# Altium PCB robot.PCBDOC (part 1 of 2)
Units mm, origin at the board's own origin, x right, y up, seen from the top; angles counter-clockwise.
Board outline 152.4 x 101.6 mm, 2 copper layers (Top Layer, Bottom Layer); 107 components, 0 nets, 589 pads, 29 vias.
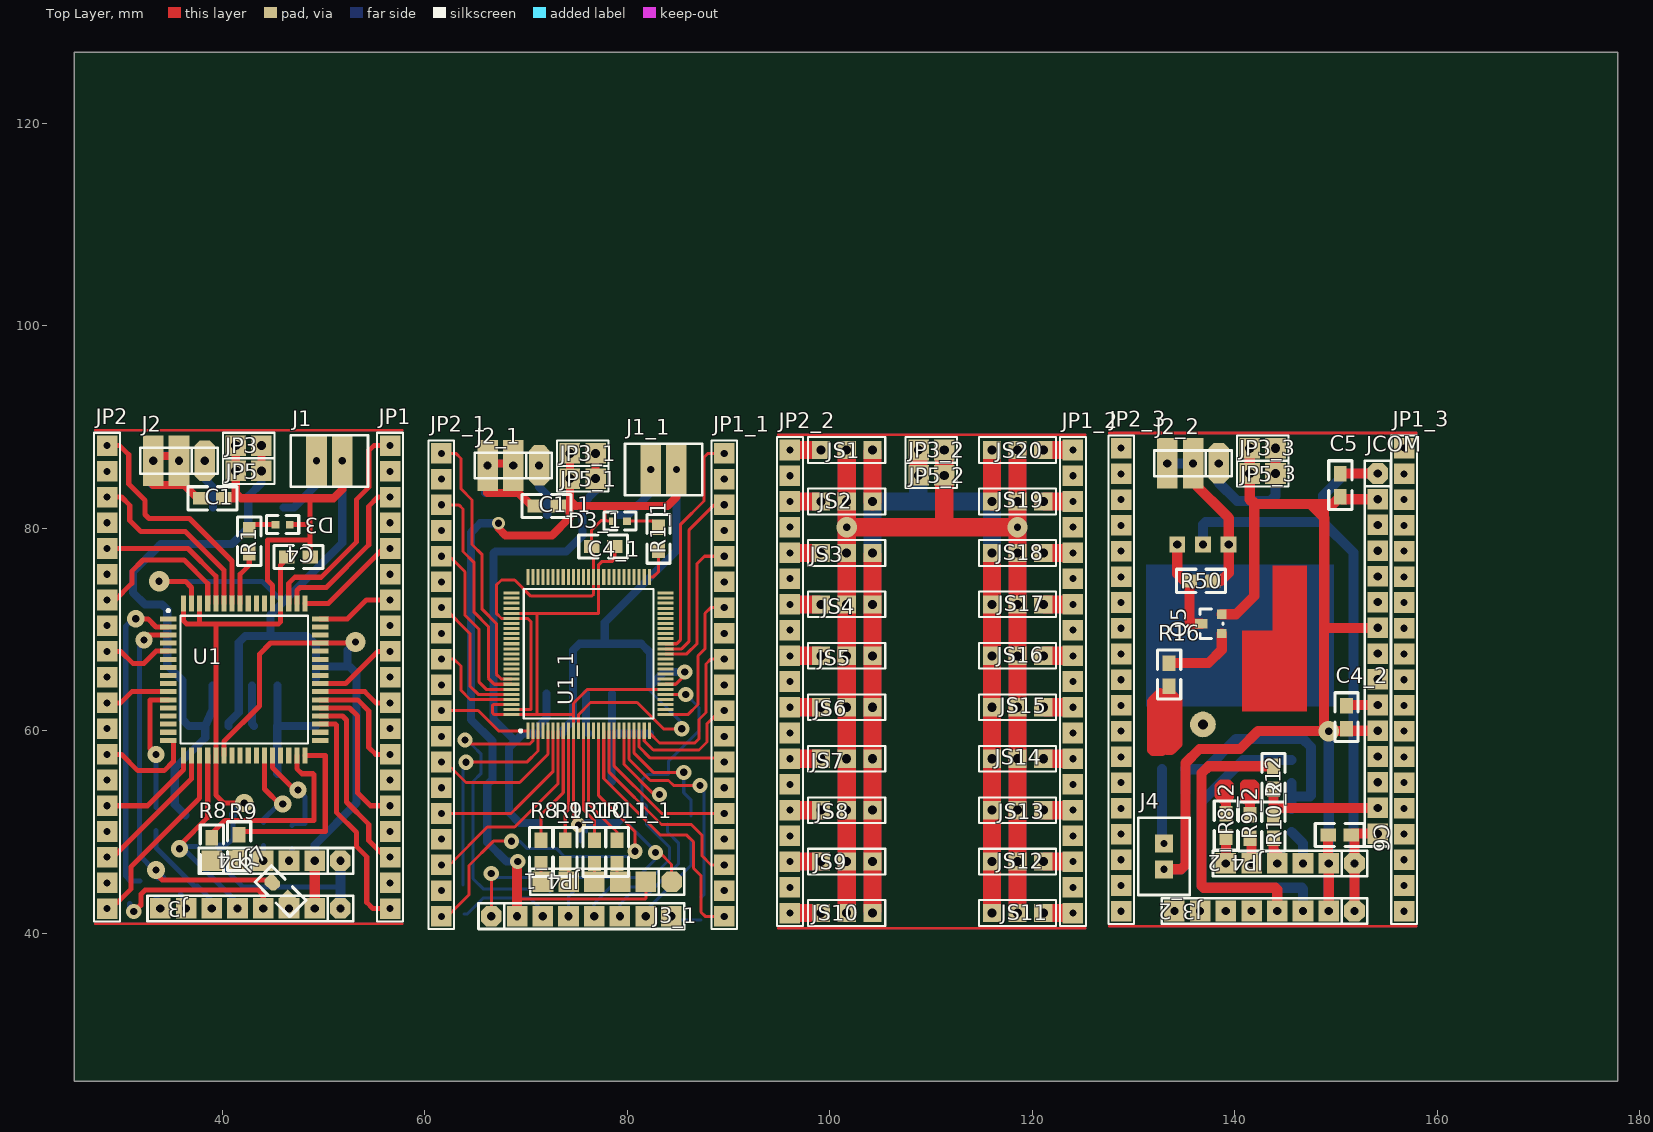
[diagram p0: Top Layer view]
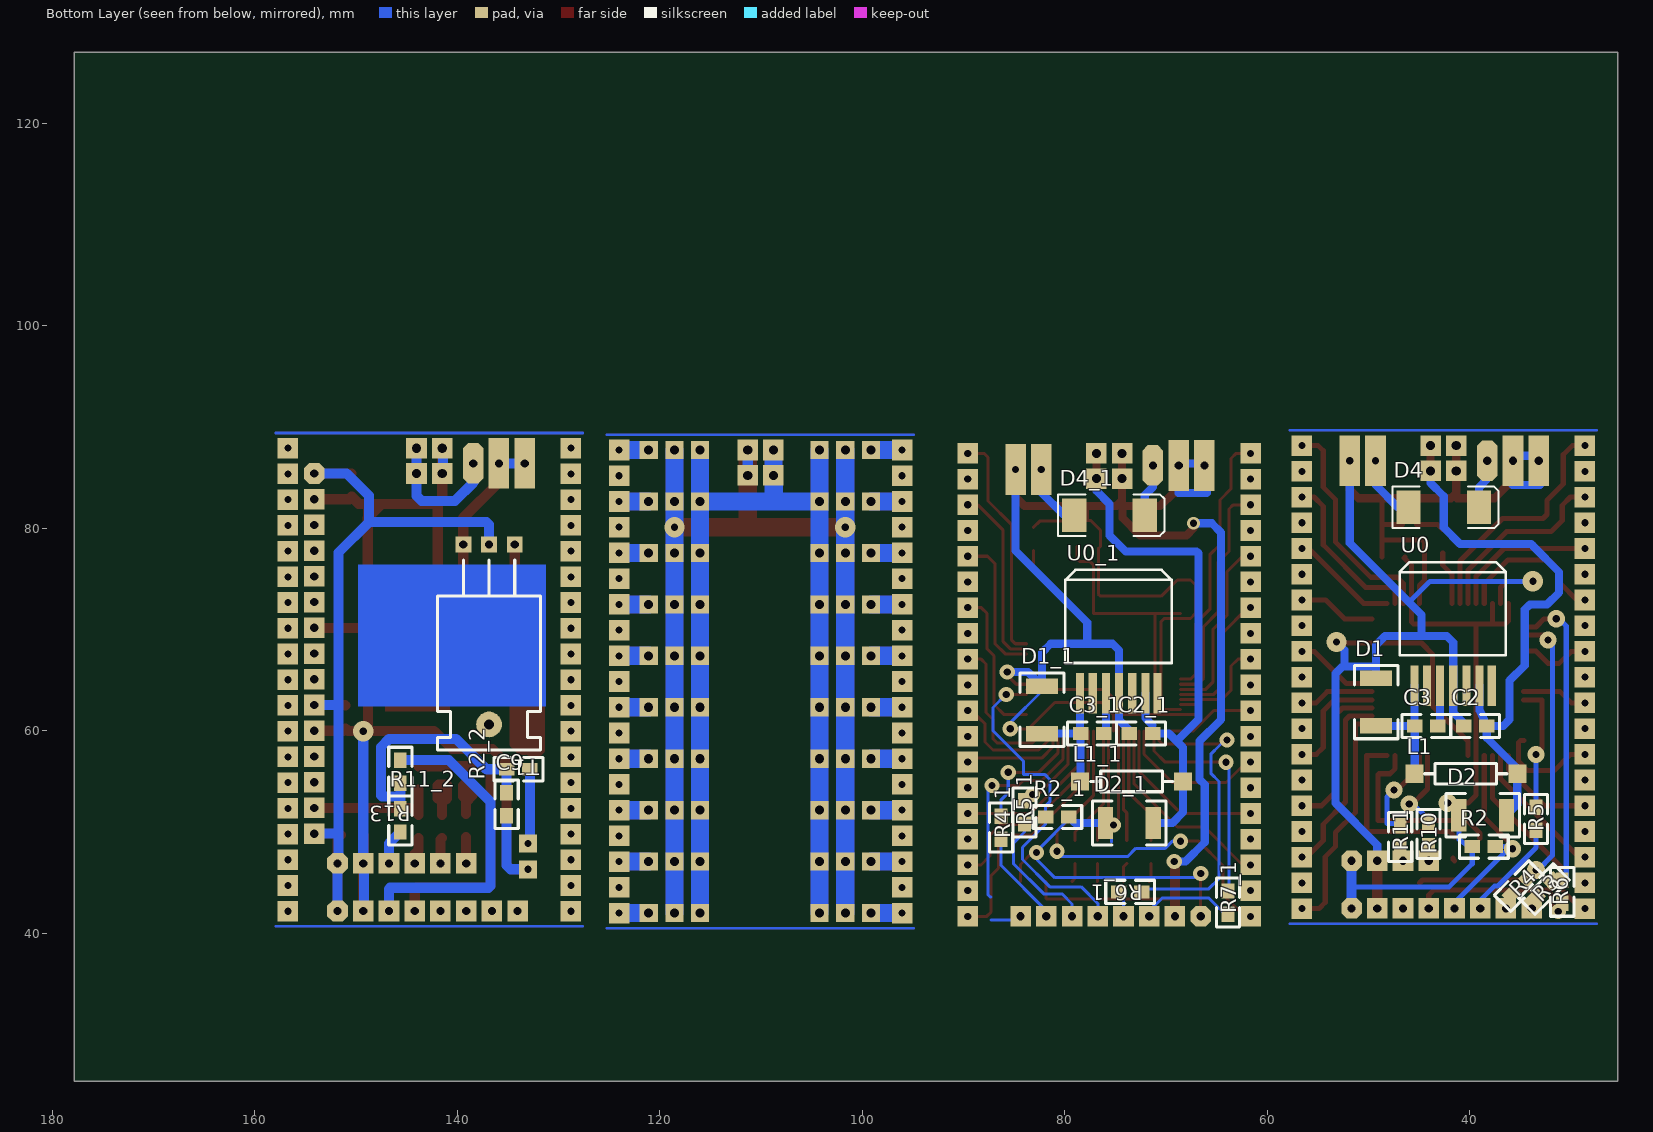
[diagram p1: Bottom Layer view, seen from below]

## Layer stack, top to bottom
Top Layer: signal copper 0.0356
Dielectric: dielectric 0.32, FR-4, Dk 4.8
Bottom Layer: signal copper 0.0356

## Board outline
25.4,25.4 177.8,25.4 177.8,127 25.4,127

## Design rules (kind name [scope] priority, off if disabled: settings)
Clearance [All] p1 off: gap=0.01
ComponentClearance [All] p1 off: gap=0.254 collisioncheckmode=0
PolygonConnect [All] p1: connectstyle=Relief reliefconductorwidth=0.254 reliefentries=4 polygonreliefangle="90 Angle"
RoutingLayers [All] p1: top layer=Horizontal bottom layer=Vertical
RoutingVias [All] p1: holewidth=0.711 width=1.27 viastyle="Through Hole" minholewidth=0.711 minwidth=1.27 maxholewidth=0.711 maxwidth=1.27
SolderMaskExpansion [All] p1: expansion=0.102
TestPointUsage [All] p1: valid=0 allowmultiple=FALSE
Testpoint [All] p1: side=15 testpointundercomponent=TRUE minsize=1.016 maxsize=2.54 preferedsize=1.524 minholesize=0 maxholesize=1.016 preferedholesize=0.813 testpointgrid=0.025 style=1023 order=1234567890
Width [All] p1 off: maxlimit=1 minlimit=0.254 preferedwidth=0.254 minimp=50.000000 maximp=50.000000 favimp=50.000000
16 further rules are at their usual default settings.

## Components (designator, comment, footprint, x,y, rotation, side; value= is the part's Value field where it differs from the comment)
C1 "100nF" 0805#1 40.178,82.962 r180 top
C1_1 "100nF" 0805#1 73.179,82.2 r180 top (schematic designator C1)
C2 "100nF" 0805#1 40.614,60.486 r180 bottom
C2_1 "100nF" 0805#1 73.615,59.724 r180 bottom (schematic designator C2)
C3 "10nF" 0805#1 43.154,60.486 r0 bottom
C3_1 "10nF" 0805#1 76.155,59.724 r0 bottom (schematic designator C3)
C4 "100nF" 0805#1 48.678,77.162 r180 top
C4_1 "100nF" 0805#1 76.479,78.2 r0 top (schematic designator C4)
C4_2 "100nF" 0805#1 151.008,60.208 r90 top (schematic designator C4)
C5 "100nF" 0805#1 150.408,83.108 r90 top
C6 "100nF" 0805#1 149.208,49.708 r0 top
C9 "220pF" 0805#1 135.108,51.608 r90 bottom
D1 "SR305" 1812 49.25,60.486 r90 bottom
D1_1 "SR305" 1812 82.251,59.724 r90 bottom (schematic designator D1)
D2 "" 1812 41.078,51.662 r180 bottom
D2_1 "" 1812 75.979,50.9 r180 bottom (schematic designator D2)
D3 "verte" 0603 45.278,80.362 r0 top
D3_1 "verte" 0603 79.979,80.7 r180 top (schematic designator D3)
D4 "Diode" DSO-C2/X3.3 42.578,82.062 r180 bottom
D4_1 "Diode" DSO-C2/X3.3 75.579,81.3 r180 bottom (schematic designator D4)
J1 "12V" CON2#1 46.778,86.662 r180 top
J1_1 "12V" CON2#1 79.779,85.8 r180 top (schematic designator J1)
J2 "INT" TSIP3 38.278,86.662 r180 top
J2_1 "INT" TSIP3 71.292,86.2 r180 top (schematic designator J2)
J2_2 "INT" TSIP3 138.408,86.408 r180 top (schematic designator J2)
J3 "TCON8" TSIP8 51.678,42.462 r180 top
J3_1 "TCON8" TSIP8 66.579,41.7 r0 top (schematic designator J3)
J3_2 "TCON8" TSIP8 151.808,42.208 r180 top (schematic designator J3)
J4 "COM" CON2#2 133.008,51.408 r90 top
JCOM "REC433" TSIP15 154.108,85.408 r0 top
JP1 "Header 19" HDR1X19 56.579,42.442 r90 top
JP1_1 "Header 19" HDR1X19 89.58,41.68 r90 top (schematic designator JP1)
JP1_2 "Header 19" HDR1X19 124.006,42.007 r90 top (schematic designator JP1)
JP1_3 "Header 19" HDR1X19 156.709,42.188 r90 top (schematic designator JP1)
JP2 "Header 19" HDR1X19 28.639,42.442 r90 top
JP2_1 "Header 19" HDR1X19 61.64,41.68 r90 top (schematic designator JP2)
JP2_2 "Header 19" HDR1X19 96.066,42.007 r90 top (schematic designator JP2)
JP2_3 "Header 19" HDR1X19 128.769,42.188 r90 top (schematic designator JP2)
JP3 "Header 2" HDR1X2 43.879,88.162 r180 top
JP3_1 "Header 2" HDR1X2 76.88,87.4 r180 top (schematic designator JP3)
JP3_2 "Header 2" HDR1X2 111.306,87.727 r180 top (schematic designator JP3)
JP3_3 "Header 2" HDR1X2 144.009,87.908 r180 top (schematic designator JP3)
JP4 "Header 6" TSIP6#1 51.678,47.162 r180 top
JP4_1 "Header 6" TSIP6#2 84.379,45.1 r180 top (schematic designator JP4)
JP4_2 "Header 6" TSIP6#3 151.808,46.908 r180 top (schematic designator JP4)
JP5 "Header 2" HDR1X2 43.878,85.662 r180 top
JP5_1 "Header 2" HDR1X2 76.879,84.9 r180 top (schematic designator JP5)
JP5_2 "Header 2" HDR1X2 111.305,85.227 r180 top (schematic designator JP5)
JP5_3 "Header 2" HDR1X2 144.008,85.408 r180 top (schematic designator JP5)
JS1 "Header 3" HDR1X3 104.205,87.727 r180 top
JS2 "Header 3" HDR1X3 104.205,82.647 r180 top
JS3 "Header 3" HDR1X3 104.205,77.567 r180 top
JS4 "Header 3" HDR1X3 104.205,72.487 r180 top
JS5 "Header 3" HDR1X3 104.205,67.407 r180 top
JS6 "Header 3" HDR1X3 104.205,62.327 r180 top
JS7 "Header 3" HDR1X3 104.205,57.247 r180 top
JS8 "Header 3" HDR1X3 104.205,52.167 r180 top
JS9 "Header 3" HDR1X3 104.205,47.087 r180 top
JS10 "Header 3" HDR1X3 104.205,42.007 r180 top
JS11 "Header 3" HDR1X3 116.005,42.007 r0 top
JS12 "Header 3" HDR1X3 116.005,47.087 r0 top
JS13 "Header 3" HDR1X3 116.005,52.167 r0 top
JS14 "Header 3" HDR1X3 116.005,57.247 r0 top
JS15 "Header 3" HDR1X3 116.005,62.327 r0 top
JS16 "Header 3" HDR1X3 116.005,67.407 r0 top
JS17 "Header 3" HDR1X3 116.005,72.487 r0 top
JS18 "Header 3" HDR1X3 116.005,77.567 r0 top
JS19 "Header 3" HDR1X3 116.005,82.647 r0 top
JS20 "Header 3" HDR1X3 116.005,87.727 r0 top
L1 "33uH" TRES 45.478,55.762 r180 bottom
L1_1 "33uH" TRES 78.479,55 r180 bottom (schematic designator L1)
Q5 "BSS123" SOT-23 138.708,69.608 r90 top
R1 "Res2" 0805#1 42.678,79.862 r270 top
R1_1 "Res2" 0805#1 83.079,80.1 r270 top (schematic designator R1)
R2 "Res2" 0805#1 37.478,48.562 r0 bottom
R2_1 "Res2" 0805#1 81.879,51.5 r180 bottom (schematic designator R2)
R2_2 "560" 0805#1 132.808,56.208 r0 bottom (schematic designator R2)
R3 "Res2" 0805#1 33.478,43.562 r135 bottom
R4 "Res2" 0805#1 35.878,43.862 r135 bottom
R4_1 "Res2" 0805#1 86.279,49.3 r90 bottom (schematic designator R4)
R5 "Res2" 0805#1 33.478,50.162 r90 bottom
R5_1 "Res2" 0805#1 83.979,50.8 r90 bottom (schematic designator R5)
R6 "Res2" 0805#1 30.878,42.962 r90 bottom
R6_1 "Res2" 0805#1 74.679,44.1 r180 bottom (schematic designator R6)
R7 "Res2" 0805#2 46.578,43.362 r135 top
R7_1 "Res2" 0805#1 63.879,41.9 r90 bottom (schematic designator R7)
R8 "Res2" 0805#1 38.978,47.162 r90 top
R8_1 "Res2" 0805#1 71.479,46.9 r90 top (schematic designator R8)
R8_2 "Res2" 0805#1 139.108,49.508 r90 top (schematic designator R8)
R9 "Res2" 0805#1 41.678,47.462 r90 top
R9_1 "Res2" 0805#1 73.879,46.9 r90 top (schematic designator R9)
R9_2 "Res2" 0805#1 141.508,49.408 r90 top (schematic designator R9)
R10 "Res2" 0805#1 44.078,48.662 r90 bottom
R10_1 "Res2" 0805#1 76.779,46.9 r90 top (schematic designator R10)
R10_2 "Res2" 0805#1 143.808,49.408 r90 top (schematic designator R10)
R11 "Res2" 0805#1 46.878,48.362 r90 bottom
R11_1 "Res2" 0805#1 78.979,46.9 r90 top (schematic designator R11)
R11_2 "Res2" 0805#1 145.608,50.008 r90 bottom (schematic designator R11)
R12 "Res2" 0805#1 143.808,56.508 r270 top
R13 "Res2" 0805#1 145.608,57.108 r270 bottom
R16 "1K" 0805#1 133.508,64.408 r90 top
R50 "1K" 0805#1 135.508,74.808 r0 top
T1 "MTP2955V" TTO220C 134.308,78.408 r0 bottom
U0 "LM2676" LM2676 46.478,70.462 r180 bottom
U0_1 "LM2676" LM2676 79.479,69.7 r180 bottom (schematic designator U0)
U1 "ATmega128-16AI" 64A 42.178,65.062 r0 top
U1_1 "ATmega1280" F-QFP14x14-G100/X.3N 76.179,67.6 r90 top (schematic designator U1)

## Footprints (in the part's own frame and the unit in brackets; to place one, negate y for a bottom-side part, rotate by r counter-clockwise, add the part's x,y. Pads: shape width x height; smd on the part's side, far side on the other; paste and mask are expansions set on the pad)
64A [mm] "QFP; 64 Leads; Body 14 x 14 mm; Pitch 0.8 mm"
  rect 1.6x0.5 smd: 1(-7.5,6) 2(-7.5,5.2) 3(-7.5,4.4) 4(-7.5,3.6) 5(-7.5,2.8) 6(-7.5,2) 7(-7.5,1.2) 8(-7.5,0.4) 9(-7.5,-0.4) 10(-7.5,-1.2) 11(-7.5,-2) 12(-7.5,-2.8) 13(-7.5,-3.6) 14(-7.5,-4.4) 15(-7.5,-5.2) 16(-7.5,-6) 33(7.5,-6) 34(7.5,-5.2) 35(7.5,-4.4) 36(7.5,-3.6) 37(7.5,-2.8) 38(7.5,-2) 39(7.5,-1.2) 40(7.5,-0.4) 41(7.5,0.4) 42(7.5,1.2) 43(7.5,2) 44(7.5,2.8) 45(7.5,3.6) 46(7.5,4.4) 47(7.5,5.2) 48(7.5,6)
  rect 0.5x1.6 smd: 17(-6,-7.5) 18(-5.2,-7.5) 19(-4.4,-7.5) 20(-3.6,-7.5) 21(-2.8,-7.5) 22(-2,-7.5) 23(-1.2,-7.5) 24(-0.4,-7.5) 25(0.4,-7.5) 26(1.2,-7.5) 27(2,-7.5) 28(2.8,-7.5) 29(3.6,-7.5) 30(4.4,-7.5) 31(5.2,-7.5) 32(6,-7.5) 49(6,7.5) 50(5.2,7.5) 51(4.4,7.5) 52(3.6,7.5) 53(2.8,7.5) 54(2,7.5) 55(1.2,7.5) 56(0.4,7.5) 57(-0.4,7.5) 58(-1.2,7.5) 59(-2,7.5) 60(-2.8,7.5) 61(-3.6,7.5) 62(-4.4,7.5) 63(-5.2,7.5) 64(-6,7.5)
  silkscreen extent -7.62,-6.3 6.3,6.92
0603 [mil]
  rect 30x30 smd: 1(0,0) 2(55,0)
  silkscreen extent -35,-35 90,35
0805#1 [mil]
  rect 60x50 smd: 1(0,0) 2(90,0)
  silkscreen extent -50,-45 140,45
0805#2 [mil]
  rect 60x50 smd: 1(0,0)
  oct 60x50 smd: 2(90,0)
  silkscreen extent -50,-45 140,45
1812 [mil]
  rect 60x125 smd: 1(0,0) 2(185,0)
  silkscreen extent -50,-85 235,85
CON2#1 [mil]
  rect 80x196.85 hole 28: 1(-200,0) 2(-100,0)
  silkscreen extent -300,-100 0,100
CON2#2 [mil]
  rect 70x70 hole 28: 1(-200,0) 2(-100,0)
  silkscreen extent -300,-100 0,100
DSO-C2/X3.3 [mm]
  rect 2.4x3.3 smd: 1(-3.475,0) 2(3.475,0)
  silkscreen extent -5.07,-2.05 5.43,2.05
F-QFP14x14-G100/X.3N [mm] "100-Pin Plastic Quad Flat Pack (TQFP)"
  rect 1.6x0.3 smd: 1(-7.6,6) 2(-7.6,5.5) 3(-7.6,5) 4(-7.6,4.5) 5(-7.6,4) 6(-7.6,3.5) 7(-7.6,3) 8(-7.6,2.5) 9(-7.6,2) 10(-7.6,1.5) 11(-7.6,1) 12(-7.6,0.5) 13(-7.6,0) 14(-7.6,-0.5) 15(-7.6,-1) 16(-7.6,-1.5) 17(-7.6,-2) 18(-7.6,-2.5) 19(-7.6,-3) 20(-7.6,-3.5) 21(-7.6,-4) 22(-7.6,-4.5) 23(-7.6,-5) 24(-7.6,-5.5) 25(-7.6,-6) 51(7.6,-6) 52(7.6,-5.5) 53(7.6,-5) 54(7.6,-4.5) 55(7.6,-4) 56(7.6,-3.5) 57(7.6,-3) 58(7.6,-2.5) 59(7.6,-2) 60(7.6,-1.5) 61(7.6,-1) 62(7.6,-0.5) 63(7.6,0) 64(7.6,0.5) 65(7.6,1) 66(7.6,1.5) 67(7.6,2) 68(7.6,2.5) 69(7.6,3) 70(7.6,3.5) 71(7.6,4) 72(7.6,4.5) 73(7.6,5) 74(7.6,5.5) 75(7.6,6)
  rect 0.3x1.6 smd: 26(-6,-7.6) 27(-5.5,-7.6) 28(-5,-7.6) 29(-4.5,-7.6) 30(-4,-7.6) 31(-3.5,-7.6) 32(-3,-7.6) 33(-2.5,-7.6) 34(-2,-7.6) 35(-1.5,-7.6) 36(-1,-7.6) 37(-0.5,-7.6) 38(0,-7.6) 39(0.5,-7.6) 40(1,-7.6) 41(1.5,-7.6) 42(2,-7.6) 43(2.5,-7.6) 44(3,-7.6) 45(3.5,-7.6) 46(4,-7.6) 47(4.5,-7.6) 48(5,-7.6) 49(5.5,-7.6) 50(6,-7.6) 76(6,7.6) 77(5.5,7.6) 78(5,7.6) 79(4.5,7.6) 80(4,7.6) 81(3.5,7.6) 82(3,7.6) 83(2.5,7.6) 84(2,7.6) 85(1.5,7.6) 86(1,7.6) 87(0.5,7.6) 88(0,7.6) 89(-0.5,7.6) 90(-1,7.6) 91(-1.5,7.6) 92(-2,7.6) 93(-2.5,7.6) 94(-3,7.6) 95(-3.5,7.6) 96(-4,7.6) 97(-4.5,7.6) 98(-5,7.6) 99(-5.5,7.6) 100(-6,7.6)
  silkscreen extent -7.72,-6.4 6.4,6.82
HDR1X2 [mil] "Connector; Header; 2 Position"
  rect 80x80 hole 35.43: 1(0,0) 2(100,0)
  silkscreen extent -50,-50 150,50
HDR1X3 [mm] "Connector; Header; 3 Position"
  rect 1.8x1.8 hole 0.9: 1(0,0) 2(2.54,0) 3(5.08,0)
  silkscreen extent -1.27,-1.27 6.35,1.27
HDR1X19 [mil] "Connector; Header; 19 Position"
  rect 80x80 hole 27.56: 1(0,0) 2(100,0) 3(200,0) 4(300,0) 5(400,0) 6(500,0) 7(600,0) 8(700,0) 9(800,0) 10(900,0) 11(1000,0) 12(1100,0) 13(1200,0) 14(1300,0) 15(1400,0) 16(1500,0) 17(1600,0) 18(1700,0) 19(1800,0)
  silkscreen extent -50,-50 1850,50
LM2676 [mm]
  rect 0.8x4 smd: 1(1,-6) 2(2.24,-6) 3(3.54,-6) 4(4.84,-6) 5(6.14,-6) 6(7.44,-6) 7(8.64,-6)
  silkscreen extent -0.46,-3 10.04,6.2
SOT-23 [mil]
  rect 36x36 smd: 1(0,0) 2(75,0)
  rect 36x50 smd: 3(38,80)
  silkscreen extent -20,-5 95,85
TRES [mil]
  rect 70x70 smd: 1(0,0) 2(400,0)
  silkscreen extent 40,-40 360,40
TSIP3 [mil]
  oct 80x157.48 hole 32: 1(0,0)
  rect 80x196.85 hole 32: 2(100,0) 3(200,0)
  silkscreen extent -50,-50 250,50
TSIP6#1 [mil]
  oct 80x80 hole 32: 1(0,0)
  rect 80x80 hole 32: 2(100,0) 3(200,0) 4(300,0)
  rect 80x80 smd: 5(400,0) 6(500,0)
  silkscreen extent -50,-50 550,50
TSIP6#2 [mil]
  oct 80x80 smd: 1(0,0)
  rect 80x80 smd: 2(100,0) 3(200,0) 4(300,0) 5(400,0) 6(500,0)
  silkscreen extent -50,-50 550,50
TSIP6#3 [mil]
  oct 80x80 hole 32: 1(0,0)
  rect 80x80 hole 32: 2(100,0) 3(200,0) 4(300,0) 5(400,0) 6(500,0)
  silkscreen extent -50,-50 550,50
TSIP8 [mil]
  oct 80x80 hole 32: 1(0,0)
  rect 80x80 hole 32: 2(100,0) 3(200,0) 4(300,0) 5(400,0) 6(500,0) 7(600,0) 8(700,0)
  silkscreen extent -50,-50 750,50
TSIP15 [mil]
  oct 80x80 hole 32: 1(0,0)
  rect 80x80 hole 32: 2(0,-100) 3(0,-200) 4(0,-300) 5(0,-400) 6(0,-500) 7(0,-600) 8(0,-700) 9(0,-800) 10(0,-900) 11(0,-1000) 12(0,-1100) 13(0,-1200) 14(0,-1300) 15(0,-1400)
  silkscreen extent -50,-1450 50,50
TTO220C [mil]
  round 100 hole 40: 0(100,700)
  rect 62x62 hole 32: 1(0,0) 2(100,0) 3(200,0)
  silkscreen extent -100,60 300,800

## Part data
C1 C1_1 C2 C2_1 C4 C4_1 C4_2 C5 C6 C9: library part CAP
C3 C3_1: library part CONDO
D1 D1_1 D2 D2_1: library part DIODE
D3 D3_1: library part LED
D4 D4_1: "Default Diode"
J1 J1_1 J4: library part CON2
J2 J2_1 J2_2: library part TCON3
JCOM: library part CON15
JP1 JP1_1 JP1_2 JP1_3 JP2 JP2_1 JP2_2 JP2_3: "Header, 19-Pin"
JP3 JP3_1 JP3_2 JP3_3 JP5 JP5_1 JP5_2 JP5_3: "Header, 2-Pin"
JP4 JP4_1 JP4_2: "Header, 6-Pin"
JS1 JS2 JS3 JS4 JS5 JS6 JS7 JS8 JS9 JS10 JS11 JS12 JS13 JS14 JS15 JS16 JS17 JS18 JS19 JS20: "Header, 3-Pin"
L1 L1_1 R2_2: library part RES2
R1 R1_1 R2 R2_1 R3 R4 R4_1 R5 R5_1 R6 R6_1 R7 R7_1 R8 R8_1 R8_2 R9 R9_1 R9_2 R10 R10_1 R10_2 R11 R11_1 R11_2 R12 R13: "Resistor"
R16 R50: library part TRESIST
U1: library part ATmega1280

## Via types
v1: diameter 1.5, hole 0.711, Top Layer to Bottom Layer, 15 vias
v2: diameter 1.7, hole 0.711, Top Layer to Bottom Layer, 6 vias
v3: diameter 2, hole 0.711, Top Layer to Bottom Layer, 5 vias
v4: diameter 1.8, hole 0.711, Top Layer to Bottom Layer, 2 vias
v5: diameter 1.27, hole 0.711, Top Layer to Bottom Layer, 1 vias

## Nets (pads, with @x,y where several pads share a name; then routed paths per layer and width w, separated by ;. In a path a pad name is that pad's centre, name@x,y a point inside that pad or via, vN(x,y) a via of type N, cw(c..) or ccw(c..) an arc to the next point about the centre after c; other vN are vias at no path point)
pads on no net: C1.1 C1.2 C1_1.1 C1_1.2 C2.1 C2.2 C2_1.1 C2_1.2 C3.1 C3.2 C3_1.1 C3_1.2 C4.1 C4.2 C4_1.1 C4_1.2 C4_2.1 C4_2.2 C5.1 C5.2 C6.1 C6.2 C9.1 C9.2 D1.1 D1.2 D1_1.1 D1_1.2 D2.1 D2.2 D2_1.1 D2_1.2 D3.1 D3.2 D3_1.1 D3_1.2 D4.1 D4.2 D4_1.1 D4_1.2 J1.1 J1.2 J1_1.1 J1_1.2 J2.1 J2.2 J2.3 J2_1.1 J2_1.2 J2_1.3 J2_2.1 J2_2.2 J2_2.3 J3.1 J3.2 J3.3 J3.4 J3.5 J3.6 J3.7 J3.8 J3_1.1 J3_1.2 J3_1.3 J3_1.4 J3_1.5 J3_1.6 J3_1.7 J3_1.8 J3_2.1 J3_2.2 J3_2.3 J3_2.4 J3_2.5 J3_2.6 J3_2.7 J3_2.8 J4.1 J4.2 JCOM.1 JCOM.2 JCOM.3 JCOM.4 JCOM.5 JCOM.6 JCOM.7 JCOM.8 JCOM.9 JCOM.10 JCOM.11 JCOM.12 JCOM.13 JCOM.14 JCOM.15 JP1.1 JP1.2 JP1.3 JP1.4 JP1.5 JP1.6 JP1.7 JP1.8 JP1.9 JP1.10 JP1.11 JP1.12 JP1.13 JP1.14 JP1.15 JP1.16 JP1.17 JP1.18 JP1.19 JP1_1.1 JP1_1.2 JP1_1.3 JP1_1.4 JP1_1.5 JP1_1.6 JP1_1.7 JP1_1.8 JP1_1.9 JP1_1.10 JP1_1.11 JP1_1.12 JP1_1.13 JP1_1.14 JP1_1.15 JP1_1.16 JP1_1.17 JP1_1.18 JP1_1.19 JP1_2.1 JP1_2.2 JP1_2.3 JP1_2.4 JP1_2.5 JP1_2.6 JP1_2.7 JP1_2.8 JP1_2.9 JP1_2.10 JP1_2.11 JP1_2.12 JP1_2.13 JP1_2.14 JP1_2.15 JP1_2.16 JP1_2.17 JP1_2.18 JP1_2.19 JP1_3.1 JP1_3.2 JP1_3.3 JP1_3.4 JP1_3.5 JP1_3.6 JP1_3.7 JP1_3.8 JP1_3.9 JP1_3.10 JP1_3.11 JP1_3.12 JP1_3.13 JP1_3.14 JP1_3.15 JP1_3.16 JP1_3.17 JP1_3.18 JP1_3.19 JP2.1 JP2.2 JP2.3 JP2.4 JP2.5 JP2.6 JP2.7 JP2.8 JP2.9 JP2.10 JP2.11 JP2.12 JP2.13 JP2.14 JP2.15 JP2.16 JP2.17 JP2.18 JP2.19 JP2_1.1 JP2_1.2 JP2_1.3 JP2_1.4 JP2_1.5 JP2_1.6 JP2_1.7 JP2_1.8 JP2_1.9 JP2_1.10 JP2_1.11 JP2_1.12 JP2_1.13 JP2_1.14 JP2_1.15 JP2_1.16 JP2_1.17 JP2_1.18 JP2_1.19 JP2_2.1 JP2_2.2 JP2_2.3 JP2_2.4 JP2_2.5 JP2_2.6 JP2_2.7 JP2_2.8 JP2_2.9 JP2_2.10 JP2_2.11 JP2_2.12 JP2_2.13 JP2_2.14 JP2_2.15 JP2_2.16 JP2_2.17 JP2_2.18 JP2_2.19 JP2_3.1 JP2_3.2 JP2_3.3 JP2_3.4 JP2_3.5 JP2_3.6 JP2_3.7 JP2_3.8 JP2_3.9 JP2_3.10 JP2_3.11 JP2_3.12 JP2_3.13 JP2_3.14 JP2_3.15 JP2_3.16 JP2_3.17 JP2_3.18 JP2_3.19 JP3.1 JP3.2 JP3_1.1 JP3_1.2 JP3_2.1 JP3_2.2 JP3_3.1 JP3_3.2 JP4.1 JP4.2 JP4.3 JP4.4 JP4.5 JP4.6 JP4_1.1 JP4_1.2 JP4_1.3 JP4_1.4 JP4_1.5 JP4_1.6 JP4_2.1 JP4_2.2 JP4_2.3 JP4_2.4 JP4_2.5 JP4_2.6 JP5.1 JP5.2 JP5_1.1 JP5_1.2 JP5_2.1 JP5_2.2 JP5_3.1 JP5_3.2 JS1.1 JS1.2 JS1.3 JS2.1 JS2.2 JS2.3 JS3.1 JS3.2 JS3.3 JS4.1 JS4.2 JS4.3 JS5.1 JS5.2 JS5.3 JS6.1 JS6.2 JS6.3 JS7.1 JS7.2 JS7.3 JS8.1 JS8.2 JS8.3 JS9.1 JS9.2 JS9.3 JS10.1 JS10.2 JS10.3 JS11.1 JS11.2 JS11.3 JS12.1 JS12.2 JS12.3 JS13.1 JS13.2 JS13.3 JS14.1 JS14.2 JS14.3 JS15.1 JS15.2 JS15.3 JS16.1 JS16.2 JS16.3 JS17.1 JS17.2 JS17.3 JS18.1 JS18.2 JS18.3 JS19.1 JS19.2 JS19.3 JS20.1 JS20.2 JS20.3 L1.1 L1.2 L1_1.1 L1_1.2 Q5.1 Q5.2 Q5.3 R1.1 R1.2 R1_1.1 R1_1.2 R2.1 R2.2 R2_1.1 R2_1.2 R2_2.1 R2_2.2 R3.1 R3.2 R4.1 R4.2 R4_1.1 R4_1.2 R5.1 R5.2 R5_1.1 R5_1.2 R6.1 R6.2 R6_1.1 R6_1.2 R7.1 R7.2 R7_1.1 R7_1.2 R8.1 R8.2 R8_1.1 R8_1.2 R8_2.1 R8_2.2 R9.1 R9.2 R9_1.1 R9_1.2 R9_2.1 R9_2.2 R10.1 R10.2 R10_1.1 R10_1.2 R10_2.1 R10_2.2 R11.1 R11.2 R11_1.1 R11_1.2 R11_2.1 R11_2.2 R12.1 R12.2 R13.1 R13.2 R16.1 R16.2 R50.1 R50.2 T1.0 T1.1 T1.2 T1.3 U0.1 U0.2 U0.3 U0.4 U0.5 U0.6 U0.7 U0_1.1 U0_1.2 U0_1.3 U0_1.4 U0_1.5 U0_1.6 U0_1.7 U1.1 U1.2 U1.3 U1.4 U1.5 U1.6 U1.7 U1.8 U1.9 U1.10 U1.11 U1.12 U1.13 U1.14 U1.15 U1.16 U1.17 U1.18 U1.19 U1.20 U1.21 U1.22 U1.23 U1.24 U1.25 U1.26 U1.27 U1.28 U1.29 U1.30 U1.31 U1.32 U1.33 U1.34 U1.35 U1.36 U1.37 U1.38 U1.39 U1.40 U1.41 U1.42 U1.43 U1.44 U1.45 U1.46 U1.47 U1.48 U1.49 U1.50 U1.51 U1.52 U1.53 U1.54 U1.55 U1.56 U1.57 U1.58 U1.59 U1.60 U1.61 U1.62 U1.63 U1.64 U1_1.1 U1_1.2 U1_1.3 U1_1.4 U1_1.5 U1_1.6 U1_1.7 U1_1.8 U1_1.9 U1_1.10 U1_1.11 U1_1.12 U1_1.13 U1_1.14 U1_1.15 U1_1.16 U1_1.17 U1_1.18 U1_1.19 U1_1.20 U1_1.21 U1_1.22 U1_1.23 U1_1.24 U1_1.25 U1_1.26 U1_1.27 U1_1.28 U1_1.29 U1_1.30 U1_1.31 U1_1.32 U1_1.33 U1_1.34 U1_1.35 U1_1.36 U1_1.37 U1_1.38 U1_1.39 U1_1.40 U1_1.41 U1_1.42 U1_1.43 U1_1.44 U1_1.45 U1_1.46 U1_1.47 U1_1.48 U1_1.49 U1_1.50 U1_1.51 U1_1.52 U1_1.53 U1_1.54 U1_1.55 U1_1.56 U1_1.57 U1_1.58 U1_1.59 U1_1.60 U1_1.61 U1_1.62 U1_1.63 U1_1.64 U1_1.65 U1_1.66 U1_1.67 U1_1.68 U1_1.69 U1_1.70 U1_1.71 U1_1.72 U1_1.73 U1_1.74 U1_1.75 U1_1.76 U1_1.77 U1_1.78 U1_1.79 U1_1.80 U1_1.81 U1_1.82 U1_1.83 U1_1.84 U1_1.85 U1_1.86 U1_1.87 U1_1.88 U1_1.89 U1_1.90 U1_1.91 U1_1.92 U1_1.93 U1_1.94 U1_1.95 U1_1.96 U1_1.97 U1_1.98 U1_1.99 U1_1.100